# Altium PCB Panel 1.PcbDoc (part 1 of 2)
Units mil, origin at the board's own origin, x right, y up, seen from the top; angles counter-clockwise.
Board outline 5905.51 x 2165.35 mil, 4 copper layers (Top Layer, Mid-Top, Mid-Bottom, Bottom Layer), stack 30.635 mil thick; 124 components, 107 nets, 426 pads, 164 vias.
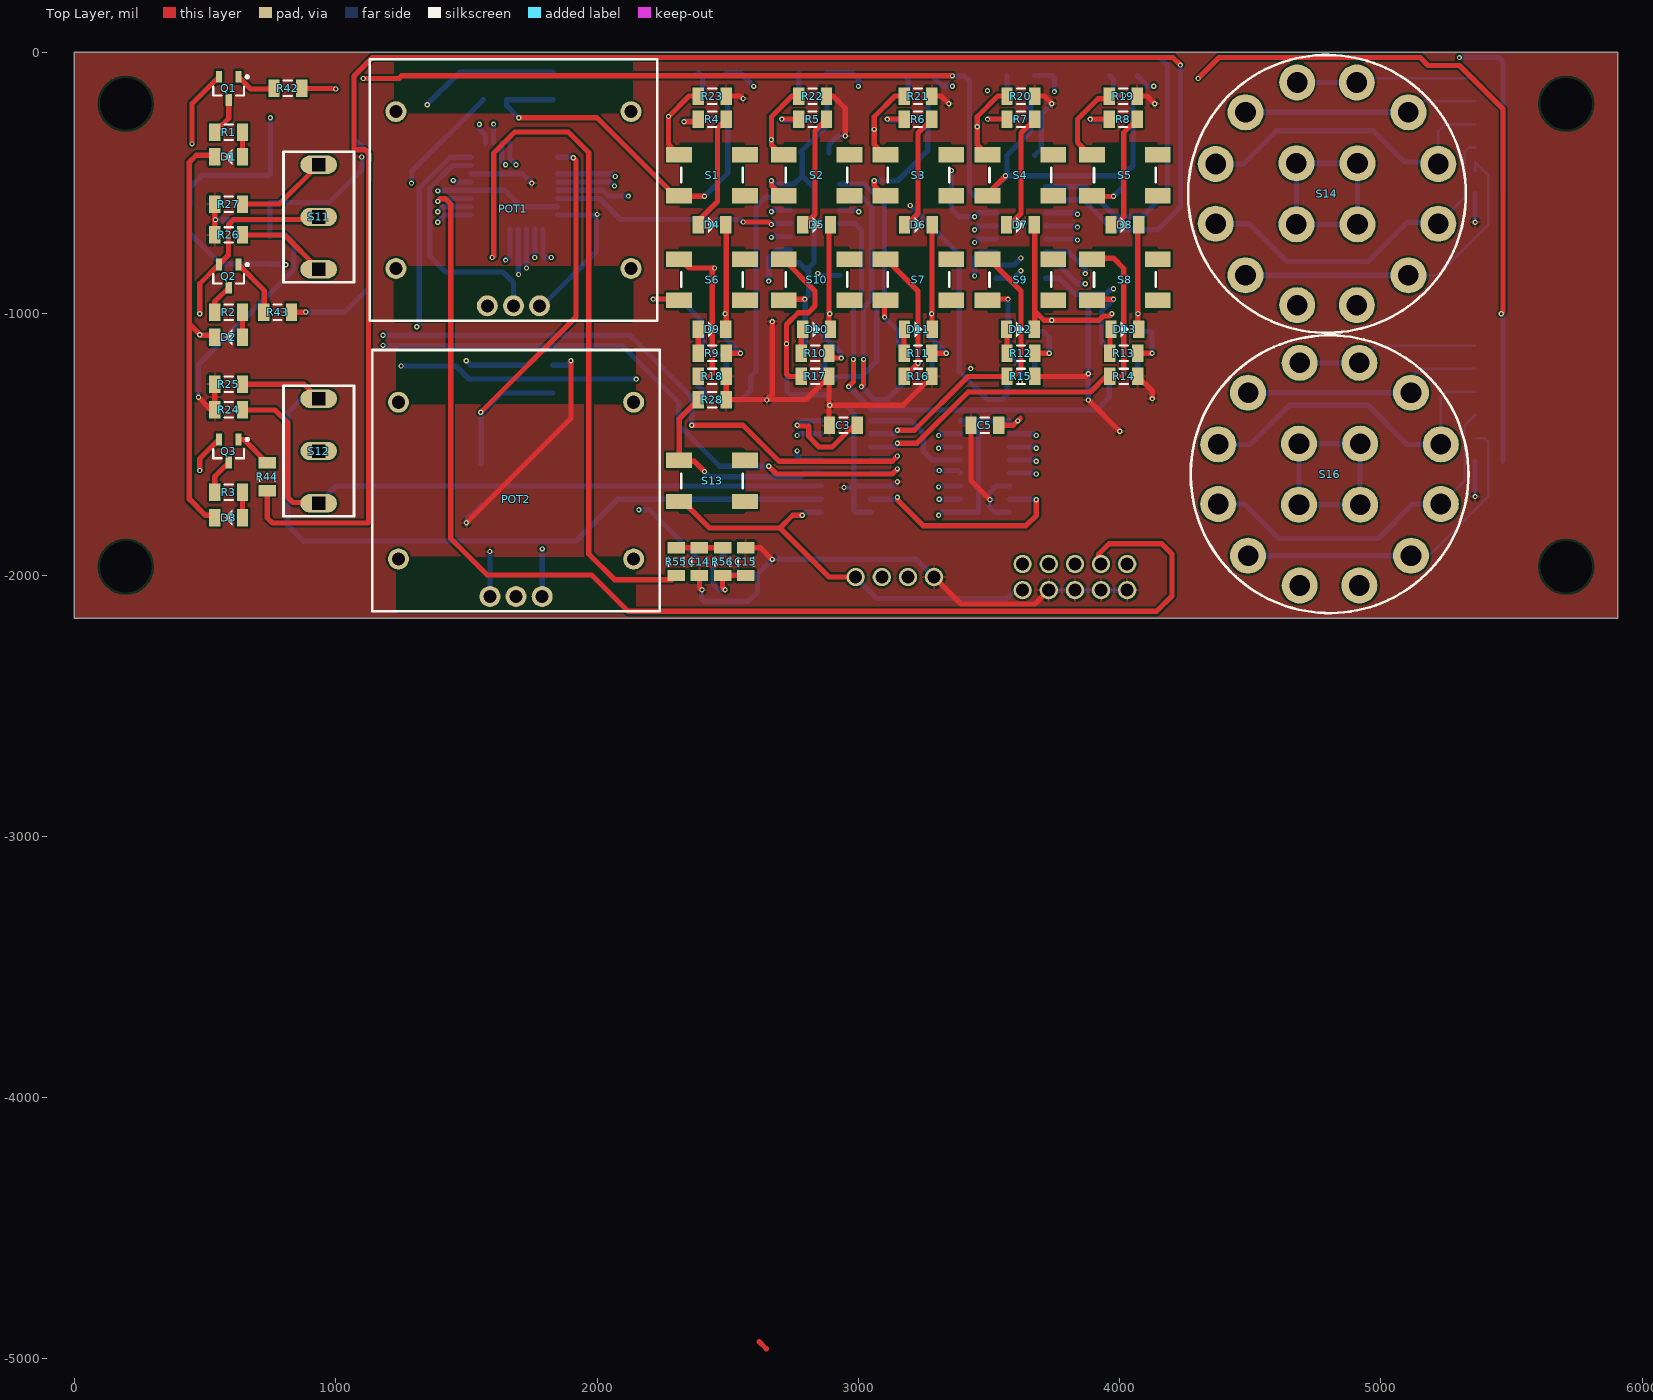
[diagram p0: Top Layer view]
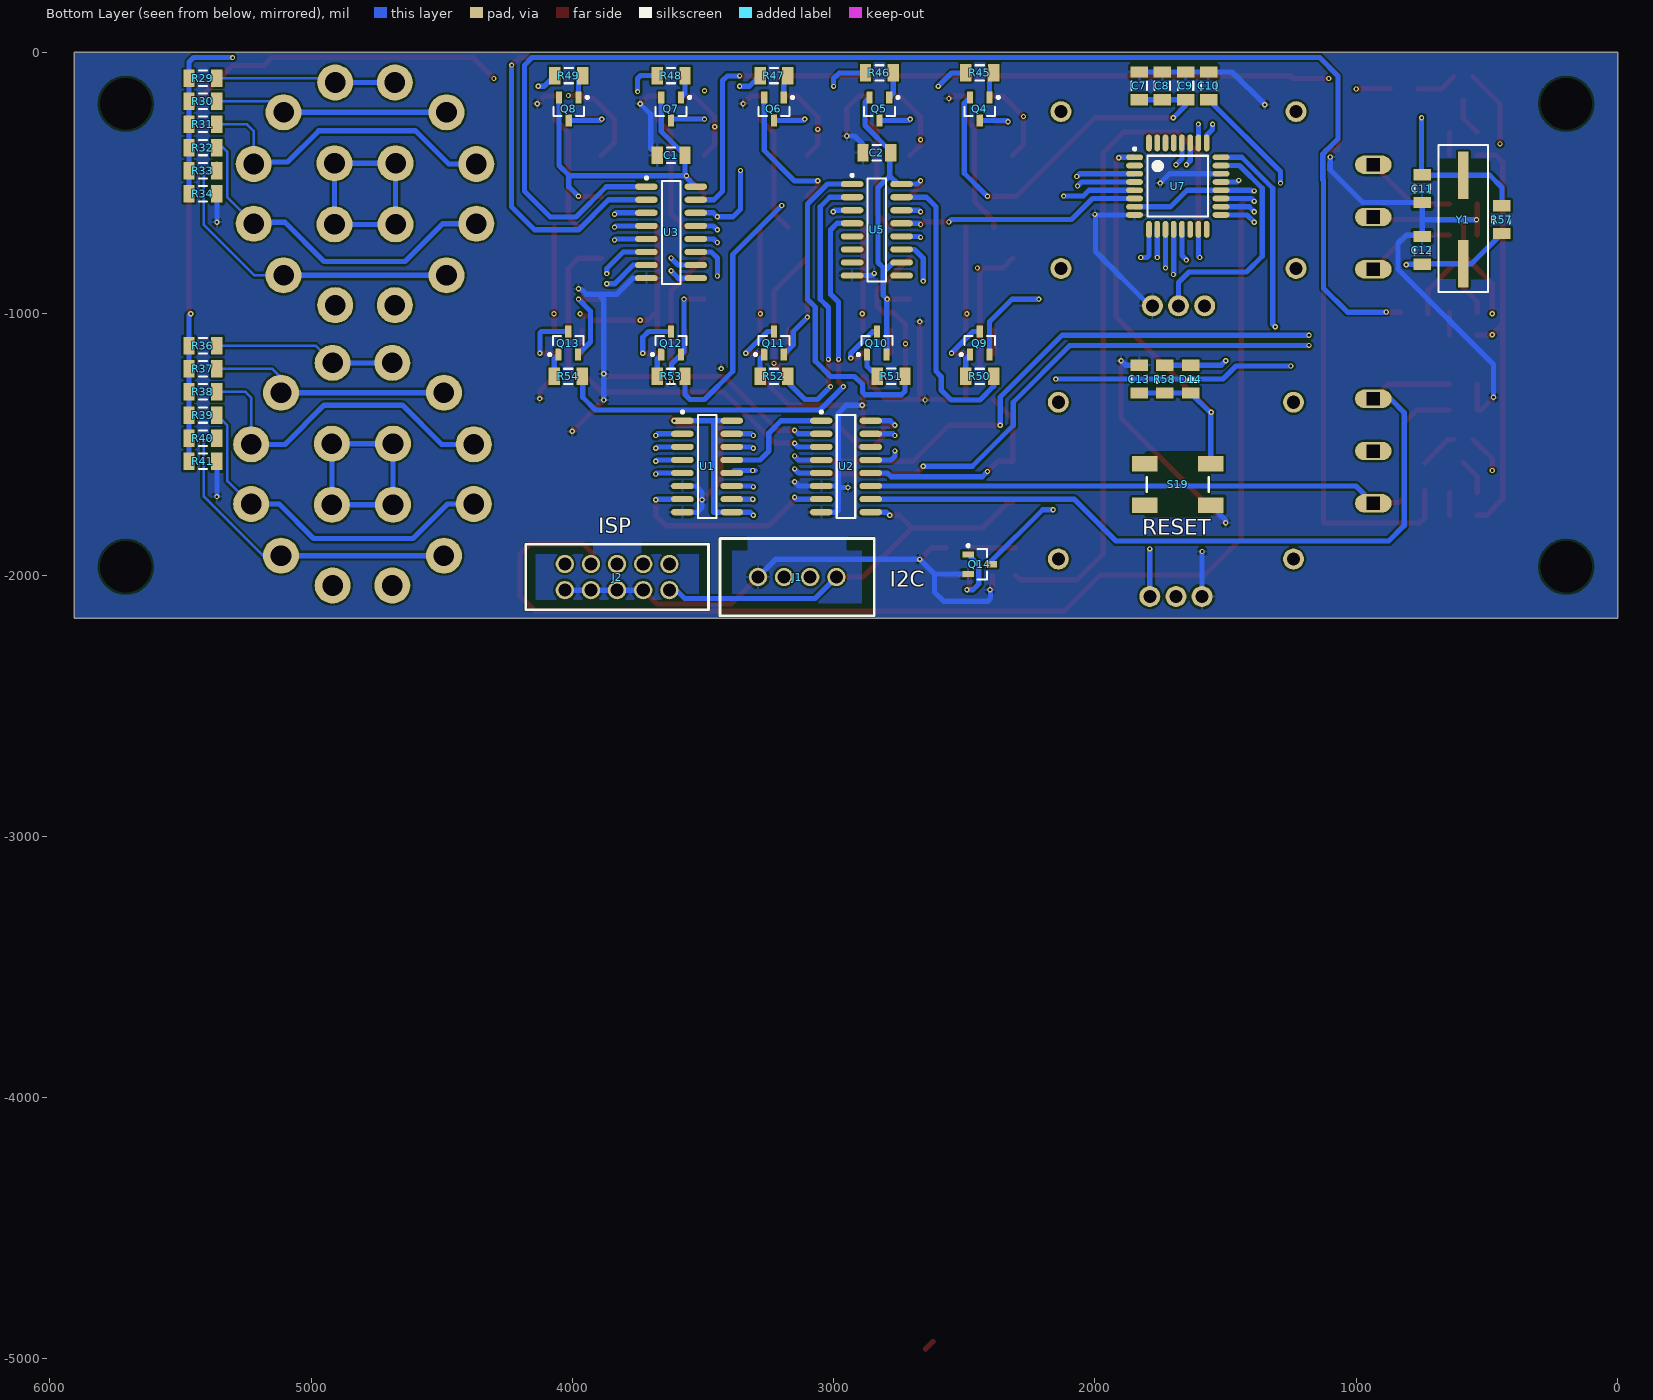
[diagram p1: Bottom Layer view, seen from below]
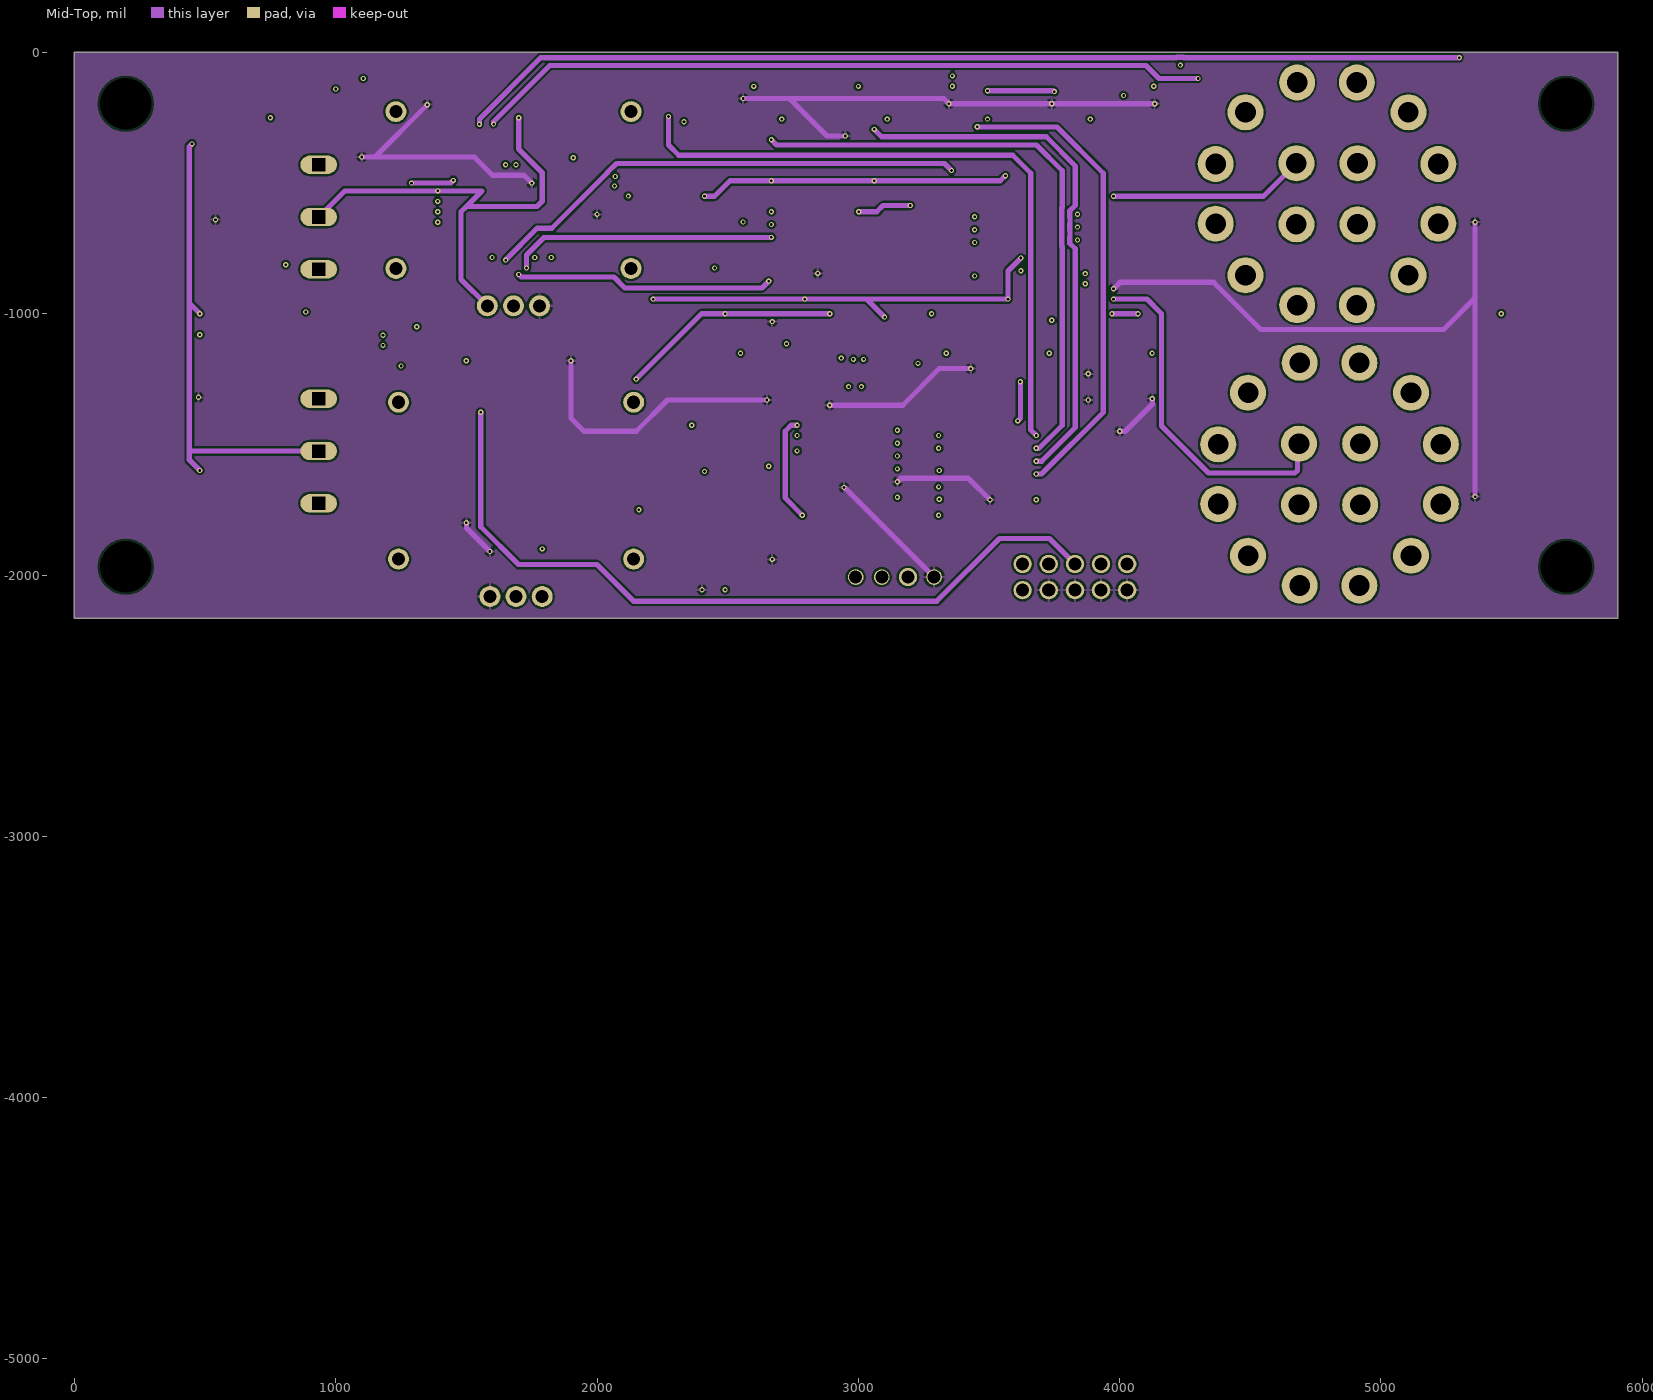
[diagram p2: Mid-Top]
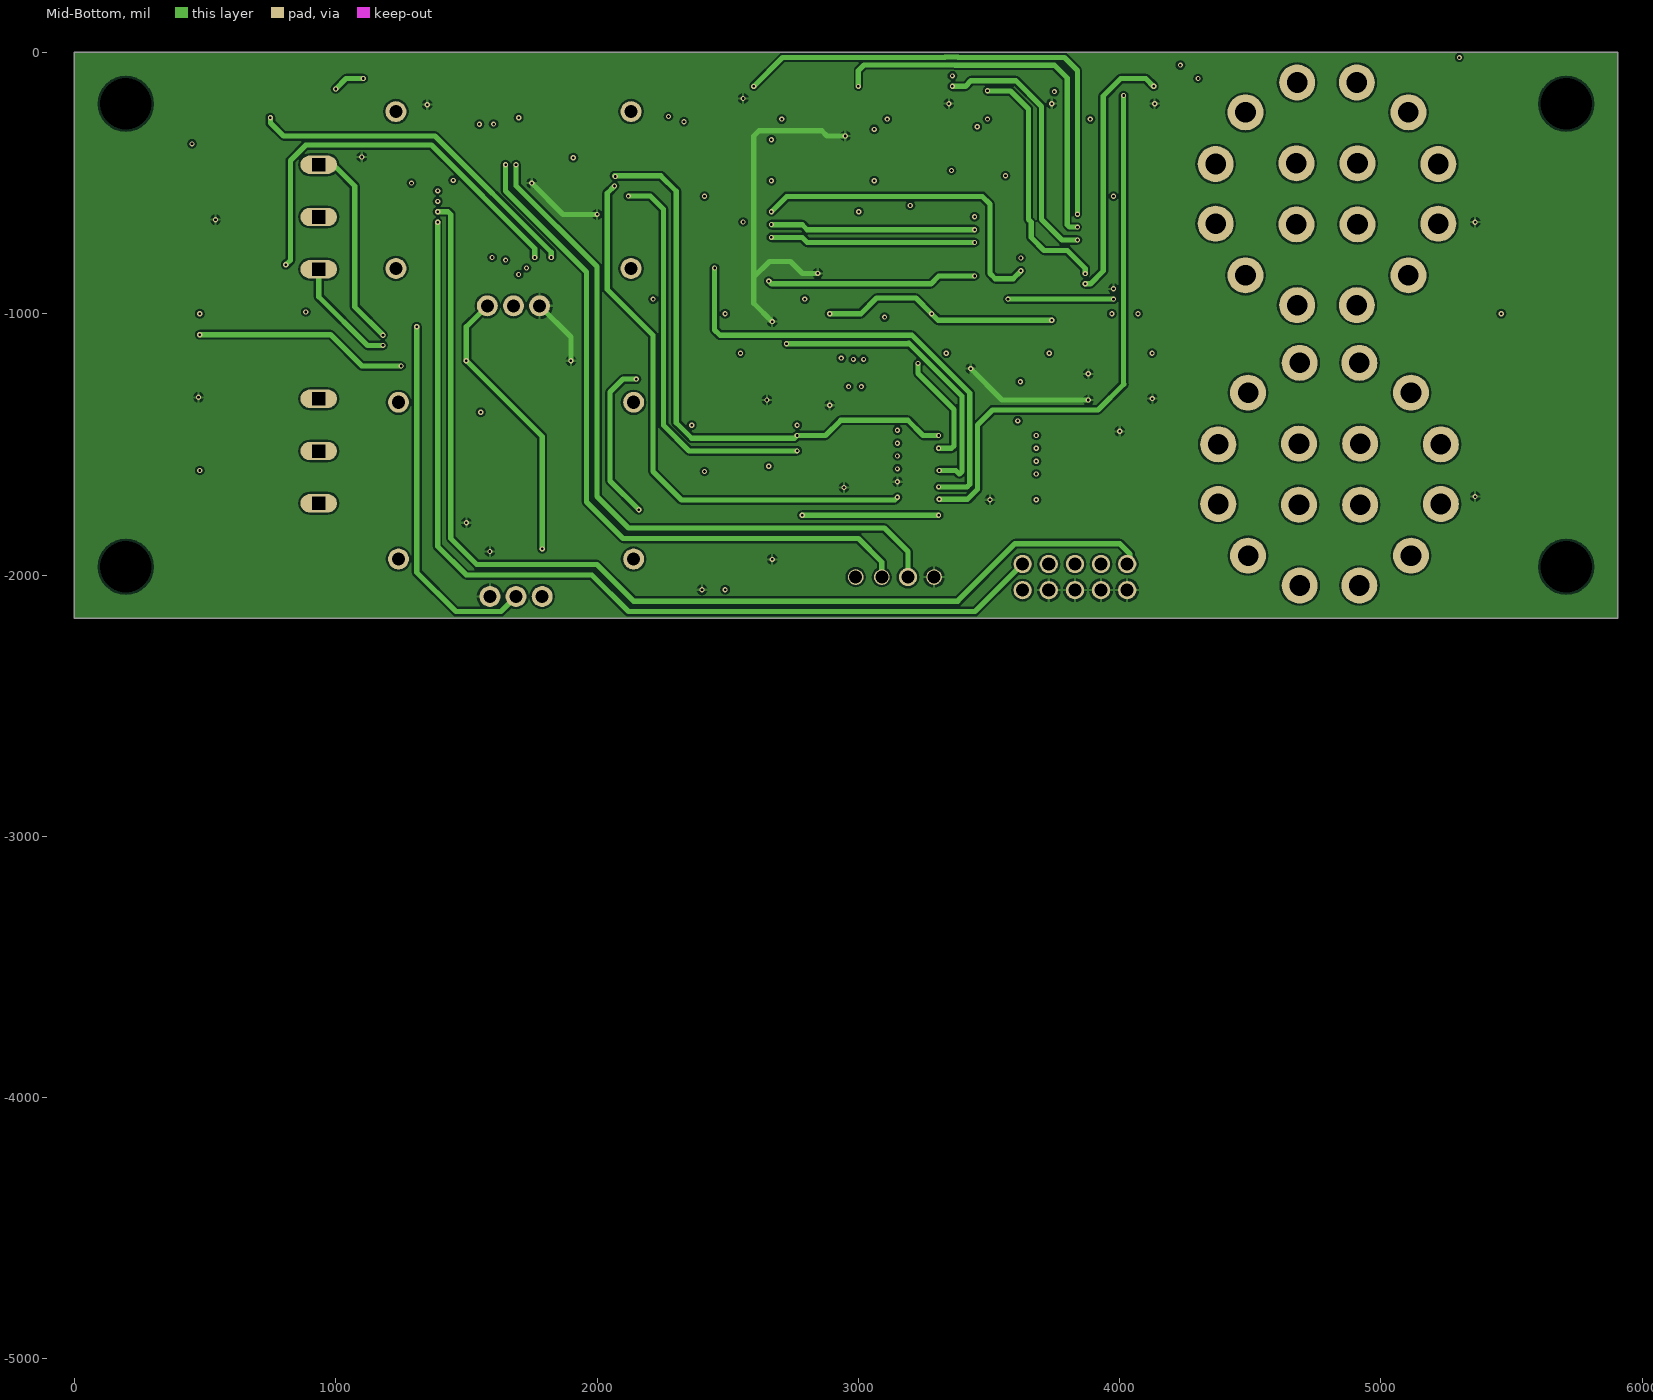
[diagram p3: Mid-Bottom]

## Layer stack, top to bottom
Top Solder: solder mask 0.4, Solder Resist, Dk 3.5
Top Layer: signal copper 1.4
Dielectric 1: core 10, FR-4, Dk 4.2
Mid-Top: signal copper 1.4173
Dielectric 3: prepreg 5, Dk 4.2
Mid-Bottom: signal copper 1.4173
Dielectric 2: core 10, Dk 4.2
Bottom Layer: signal copper 1.4
Bottom Solder: solder mask 0.4, Solder Resist, Dk 3.5

## Board outline
0,-2165.35 2952.76,-2165.35 5905.51,-2165.35 5905.51,-1771.65 5905.51,-1062.99 5905.51,-629.92 5905.51,-393.7 5905.51,0 0,0 0,-393.7 0,-787.4 0,-1102.36 0,-1377.95 0,-1771.65

## Design rules (kind name [scope] priority, off if disabled: settings)
Clearance [All] p1: gap=8 ignorepadtopadclearanceinfootprint=FALSE except(0: Arc-Hole Track-Hole SMDPad-Hole THPad-Hole Via-Hole Fill-Hole Poly-Hole Region-Hole Text-Hole)
Height [All] p1: minheight=0 maxheight=3937.01 prefheight=500
HoleSize [All] p1: absolutevalues=TRUE maxlimit=3937.01 minlimit=1 maxpercent=80.000 minpercent=20.000
HoleToHoleClearance [All] p1: gap=8 allowstackedmicrovias=TRUE
MinimumSolderMaskSliver [All] p1: minsoldermaskwidth=8
PolygonConnect [All] p1: connectstyle=Relief reliefconductorwidth=10 reliefentries=4 polygonreliefangle="90 Angle" airgapwidth=10
RoomDefinition Panel [InComponentClass('Panel')] p1 off: confinementstyle=ConfineIn formatcopy=TRUE lockcomponents=FALSE outline 20511.81,3608.27 41063,3608.27 41063,6994.1 20511.81,6994.1
RoutingVias [All] p1: holewidth=10 width=20 viastyle="Through Hole" minholewidth=10 minwidth=20 maxholewidth=10 maxwidth=20
SilkToSilkClearance [All] p1: silktosilkclearance=8
SilkToSolderMaskClearance [IsPad] p1: minsilkscreentomaskgap=8 clearancetoexposedcopper=TRUE
SolderMaskExpansion [All] p1: expansion=3
Width [All] p1: maxlimit=20 minlimit=10 preferedwidth=20
24 further rules are at their usual default settings.

## Classes and differential pairs
component class sterownik: C7 C8 C9 C10 C11 C12 C13 D14 J1 J2 R57 R58 S19 U7 Y1
component class SIPO: C3 C5 U3 U5
component class PISO: C1 C2 U1 U2
component class Driving: C14 C15 Q1 Q2 Q3 Q4 Q5 Q6 Q7 Q8 Q9 Q10 Q11 Q12 Q13 Q14 R42 R43 R44 R45 R46 R47 R48 R49 R50 R51 R52 R53 R54 R55 R56
component class Panel: D1 D2 D3 D4 D5 D6 D7 D8 D9 D10 D11 D12 D13 POT2 R1 R2 R3 R4 R5 R6 R7 R8 R9 R10 R11 R12 R13 R14 R15 R16 R17 R18 R19 R20 R21 R22 R23 R24 R25 R26 R27 R28 R29 R30 R31 R32 R33 R34 R36 R37 R38 R39 R40 R41 S1 S2 S3 S4 S5 S6 S7 S8 S9 S10 S11 S12 S13 S14

## Components (designator, comment, footprint, x,y, rotation, side; value= is the part's Value field where it differs from the comment)
C1 "Cap" C1206 3622.05,-393.7 r180 bottom
C2 "Cap" C1206 2834.65,-383.86 r180 bottom
C3 "Cap" C1206 2942.91,-1427.17 r0 top
C5 "Cap" C1206 3484.25,-1427.17 r0 top
C7 "Cap" C1206 1830.71,-127.95 r270 bottom
C8 "Cap" C1206 1742.13,-127.95 r270 bottom
C9 "Cap" C1206 1653.54,-127.95 r270 bottom
C10 "Cap" C1206 1564.96,-127.95 r90 bottom
C11 "Cap" C1206 748.03,-521.65 r90 bottom
C12 "Cap" C1206 748.03,-757.87 r270 bottom
C13 "Cap" C1206 1830.71,-1250 r270 bottom
C14 "Cap" C1206 2391.73,-1948.82 r90 top
C15 "Cap" C1206 2568.9,-1948.82 r270 top
D1 "Niebieska" "Dioda SMD 1206 Niebieska" 590,-400 r180 top
D2 "Zielona" "Dioda SMD 1206 Zielona" 590,-1090 r180 top
D3 "Biała" "Dioda SMD 1206 Biala" 590,-1780 r180 top
D4 "LED0" "Dioda SMD 1206 Zielona" 2440,-660 r0 top
D5 "LED0" "Dioda SMD 1206 Zielona" 2840,-660 r0 top
D6 "LED0" "Dioda SMD 1206 Zielona" 3230,-660 r0 top
D7 "LED0" "Dioda SMD 1206 Zielona" 3620,-660 r0 top
D8 "LED0" "Dioda SMD 1206 Zielona" 4020,-660 r0 top
D9 "LED0" "Dioda SMD 1206 Zielona" 2440,-1060 r0 top
D10 "LED0" "Dioda SMD 1206 Zielona" 2840,-1060 r0 top
D11 "LED0" "Dioda SMD 1206 Zielona" 3230,-1060 r0 top
D12 "LED0" "Dioda SMD 1206 Zielona" 3620,-1060 r0 top
D13 "LED0" "Dioda SMD 1206 Zielona" 4020,-1060 r0 top
D14 "1N4148" "DIODA 1N4148" 1633.86,-1250 r90 bottom
J1 "i2c" "IDC 4PIN" 3139.76,-2007.87 r0 bottom
J2 "SPI" "IDC 10PIN" 3828.74,-2007.87 r0 bottom
POT1 "RPot" "Potentiometer - duplicate" 1230.32,-826.77 r0 top
POT2 "POT2" Potentiometer 1240.16,-1938.98 r0 top
Q1 "PNP" SOT-23B_N 590.55,-137.8 r270 top
Q2 "PNP" SOT-23B_N 590.55,-856.3 r270 top
Q3 "PNP" SOT-23B_N 590.55,-1525.59 r270 top
Q4 "PNP" SOT-23B_N 2440.94,-216.54 r270 bottom
Q5 "PNP" SOT-23B_N 2824.8,-216.54 r270 bottom
Q6 "PNP" SOT-23B_N 3228.35,-216.54 r270 bottom
Q7 "PNP" SOT-23B_N 3622.05,-216.54 r270 bottom
Q8 "PNP" SOT-23B_N 4013.78,-216.54 r270 bottom
Q9 "PNP" SOT-23B_N 2440.94,-1112.2 r90 bottom
Q10 "PNP" SOT-23B_N 2834.65,-1112.2 r90 bottom
Q11 "PNP" SOT-23B_N 3228.35,-1112.2 r90 bottom
Q12 "PNP" SOT-23B_N 3622.05,-1112.2 r90 bottom
Q13 "PNP" SOT-23B_N 4015.75,-1112.2 r90 bottom
Q14 "NPN" SOT-23B_N 2440.94,-1958.66 r180 bottom
R1 "" C1206 590.55,-305.12 r0 top
R2 "Res2" C1206 590.55,-994.09 r0 top
R3 "Res2" C1206 590.55,-1683.07 r0 top
R4 "Res2" C1206 2440.94,-255.91 r0 top
R5 "Res2" C1206 2824.8,-255.91 r0 top
R6 "Res2" C1206 3228.35,-255.91 r0 top
R7 "Res2" C1206 3622.05,-255.91 r0 top
R8 "Res2" C1206 4013.78,-255.91 r0 top
R9 "Res2" C1206 2440.94,-1151.57 r180 top
R10 "Res2" C1206 2834.65,-1151.57 r180 top
R11 "Res2" C1206 3228.35,-1151.57 r180 top
R12 "Res2" C1206 3622.05,-1151.57 r180 top
R13 "Res2" C1206 4015.75,-1151.57 r180 top
R14 "Res2" C1206 4015.75,-1240.16 r180 top
R15 "Res2" C1206 3622.05,-1240.16 r180 top
R16 "Res2" C1206 3228.35,-1240.16 r180 top
R17 "Res2" C1206 2834.65,-1240.16 r180 top
R18 "Res2" C1206 2440.94,-1240.16 r180 top
R19 "Res2" C1206 4013.78,-167.32 r180 top
R20 "Res2" C1206 3622.05,-167.32 r180 top
R21 "Res2" C1206 3228.35,-167.32 r180 top
R22 "Res2" C1206 2824.8,-167.32 r180 top
R23 "Res2" C1206 2440.94,-167.32 r180 top
R24 "Res2" C1206 590.55,-1368.11 r0 top
R25 "Res2" C1206 590.55,-1269.68 r0 top
R26 "Res2" C1206 590.55,-698.82 r0 top
R27 "Res2" C1206 590.55,-580.71 r0 top
R28 "Res2" C1206 2440.94,-1328.74 r0 top
R29 "Res2" C1206 5413.39,-98.43 r0 bottom
R30 "Res2" C1206 5413.39,-187.01 r0 bottom
R31 "Res2" C1206 5413.39,-275.59 r0 bottom
R32 "Res2" C1206 5413.39,-364.17 r0 bottom
R33 "Res2" C1206 5413.39,-452.76 r0 bottom
R34 "Res2" C1206 5413.39,-541.34 r0 bottom
R36 "Res2" C1206 5413.39,-1122.05 r0 bottom
R37 "Res2" C1206 5413.39,-1210.63 r0 bottom
R38 "Res2" C1206 5413.39,-1299.21 r0 bottom
R39 "Res2" C1206 5413.39,-1387.8 r0 bottom
R40 "Res2" C1206 5413.39,-1476.38 r0 bottom
R41 "Res2" C1206 5413.39,-1564.96 r0 bottom
R42 "Res2" C1206 816.93,-137.8 r180 top
R43 "Res2" C1206 777.56,-994.09 r180 top
R44 "Res2" C1206 738.19,-1624.02 r90 top
R45 "Res2" C1206 2440.94,-78.74 r180 bottom
R46 "Res2" C1206 2824.8,-78.74 r180 bottom
R47 "Res2" C1206 3228.35,-88.58 r180 bottom
R48 "Res2" C1206 3622.05,-88.58 r180 bottom
R49 "Res2" C1206 4013.78,-88.58 r180 bottom
R50 "Res2" C1206 2440.94,-1240.16 r0 bottom
R51 "Res2" C1206 2780,-1240 r0 bottom
R52 "Res2" C1206 3228.35,-1240.16 r0 bottom
R53 "Res2" C1206 3622.05,-1240.16 r0 bottom
R54 "Res2" C1206 4015.75,-1240.16 r0 bottom
R55 "Res2" C1206 2303.15,-1948.82 r90 top
R56 "Res2" C1206 2480.32,-1948.82 r270 top
R57 "Res2" C1206 442.91,-639.76 r90 bottom
R58 "Res2" C1206 1732.28,-1250 r90 bottom
S1 "SW-PB" "Microswitch_SMT - duplicate" 2440,-470 r180 top
S2 "SW-PB" "Microswitch_SMT - duplicate" 2840,-470 r180 top
S3 "SW-PB" "Microswitch_SMT - duplicate" 3230,-470 r180 top
S4 "SW-PB" "Microswitch_SMT - duplicate" 3620,-470 r180 top
S5 "SW-PB" "Microswitch_SMT - duplicate" 4020,-470 r180 top
S6 "SW-PB" "Microswitch_SMT - duplicate" 2440,-870 r180 top
S7 "SW-PB" "Microswitch_SMT - duplicate" 3230,-870 r180 top
S8 "SW-PB" "Microswitch_SMT - duplicate" 4020,-870 r180 top
S9 "SW-PB" "Microswitch_SMT - duplicate" 3620,-870 r180 top
S10 "SW-PB" "Microswitch_SMT - duplicate" 2840,-870 r180 top
S11 "SW-SPDT" "3POZ SWITCH" 935.04,-629.92 r0 top
S12 "SW-SPDT" "3POZ SWITCH" 935.04,-1525.59 r0 top
S13 "SW-PB" "Microswitch_SMT - duplicate" 2440,-1640 r180 top
S14 "5SW" "ROT SW" 4793.31,-541.34 r0 top
S16 "5SW" "ROT SW" 4803.15,-1614.17 r0 top
S19 "SW-PB" "Microswitch_SMT - duplicate" 1683.07,-1653.54 r0 bottom
U1 "SN74HC166D" D016_N 3484.25,-1584.65 r180 bottom
U2 "SN74HC166D" D016_N 2952.76,-1584.65 r180 bottom
U3 "SN74HC595D" SOIC16_N 3622.05,-688.98 r180 bottom
U5 "SN74HC595N" SOIC16_N 2834.65,-679.13 r180 bottom
U7 "ATmega8A-AU" 32A_N 1683.07,-511.81 r180 bottom
Y1 "16Mhz" crystal 590.55,-639.76 r90 bottom

## Footprints (in the part's own frame and the unit in brackets; to place one, negate y for a bottom-side part, rotate by r counter-clockwise, add the part's x,y. Pads: shape width x height; smd on the part's side, far side on the other; paste and mask are expansions set on the pad)
"3POZ SWITCH" [mil] "SP3T switch"
  oval 140x70 hole 50 square: 1(0,-200) 2(0,0) 3(0,200)
  silkscreen extent -135,-250 135,250, body extent -135,-250 135,292, height 1107
32A_N [mm] "Thin QFP, 32-Leads, Body 7x7mm, Pitch 0.8mm, IPC Medium Density"
  oval 1.65x0.55 smd mask+0: 1(-4.2,2.8) 2(-4.2,2) 3(-4.2,1.2) 4(-4.2,0.4) 5(-4.2,-0.4) 6(-4.2,-1.2) 7(-4.2,-2) 8(-4.2,-2.8) 17(4.2,-2.8) 18(4.2,-2) 19(4.2,-1.2) 20(4.2,-0.4) 21(4.2,0.4) 22(4.2,1.2) 23(4.2,2) 24(4.2,2.8)
  oval 0.55x1.65 smd mask+0: 9(-2.8,-4.2) 10(-2,-4.2) 11(-1.2,-4.2) 12(-0.4,-4.2) 13(0.4,-4.2) 14(1.2,-4.2) 15(2,-4.2) 16(2.8,-4.2) 25(2.8,4.2) 26(2,4.2) 27(1.2,4.2) 28(0.4,4.2) 29(-0.4,4.2) 30(-1.2,4.2) 31(-2,4.2) 32(-2.8,4.2)
  silkscreen extent -4.33,-2.95 2.95,3.75, body extent -3.5,-3.5 3.5,3.5, height 1.2
C1206 [mm] "Chip Capacitor, Body 3.2x1.6mm, IPC High Density"
  rect 1.1x1.7 smd: 1(-1.35,0) 2(1.35,0)
  silkscreen extent -0.4,-0.75 0.4,0.75, body extent -1.7,-0.9 1.7,0.9, height 1.3
crystal [mm] "Rezonator , montaż smd"
  rect 4.6x1 smd: 1(-4.3,0) 2(4.3,0)
  silkscreen extent -7.05,-2.4 7.25,2.4, body extent -5.6,-2.4 5.7,2.4, height 4.2
D016_N [mm] "SOIC, 16-Leads, Body 9.9x3.9mm, Pitch 1.27mm, IPC Medium Density"
  oval 2.2x0.6 smd: 1(-2.4,4.445) 2(-2.4,3.175) 3(-2.4,1.905) 4(-2.4,0.635) 5(-2.4,-0.635) 6(-2.4,-1.905) 7(-2.4,-3.175) 8(-2.4,-4.445) 9(2.4,-4.445) 10(2.4,-3.175) 11(2.4,-1.905) 12(2.4,-0.635) 13(2.4,0.635) 14(2.4,1.905) 15(2.4,3.175) 16(2.4,4.445)
  silkscreen extent -2.53,-5 0.9,5.42, body extent -1.95,-4.95 1.95,4.95, height 1.75
"DIODA 1N4148" [mm] "Dioda uniwersalna, SMD"
  rect 1.1x1.7 smd: 1(-1.35,0) 2(1.35,0)
  silkscreen extent -0.38,-0.76 0.38,0.76, body extent -1.91,-0.89 1.91,2.29, height 1.25
"Dioda SMD 1206 Biala" [mm]
  rect 1.1x1.7 smd: 1(-1.35,0) 2(1.35,0)
  silkscreen extent -0.38,-0.76 0.38,0.76, body extent -1.91,-0.89 1.91,2.29, height 1.25
"Dioda SMD 1206 Niebieska" [mm]
  rect 1.1x1.7 smd: 1(-1.35,0) 2(1.35,0)
  silkscreen extent -0.38,-0.76 0.38,0.76, body extent -1.91,-0.89 1.91,2.29, height 1.25
"Dioda SMD 1206 Zielona" [mm]
  rect 1.1x1.7 smd: 1(-1.35,0) 2(1.35,0)
  silkscreen extent -0.38,-0.76 0.38,0.76, body extent -1.91,-0.89 1.91,2.29, height 1.25
"IDC 4PIN" [mil]
  round 70 / inner round 60 / far side round 70 hole 50: 1(-150,0) 2(-50,0) 4(150,0)
  round 70 hole 50: 3(50,0)
  silkscreen extent -295,-148 295,148, body extent -295,-148 295,148, height 472
"IDC 10PIN" [mil]
  round 70 hole 50: 1(-200,50) 2(-100,50) 3(0,50) 4(100,50) 5(200,50) 6(-200,-50) 7(-100,-50) 8(0,-50) 9(100,-50) 10(200,-50)
  silkscreen extent -350,-125 350,125, body extent -350,-125 350,125, height 350
"Microswitch_SMT - duplicate" [mm] "Tact switch, montaż przewlekany"
  rect 2.5x1.5 smd: 0(-3.2,-2) 0(3.2,-2) 1(-3.2,2) 1(3.2,2)
  silkscreen extent -3,-0.7 3,0.7, body extent -3,-3 3,3, height 7.05
Potentiometer [mil] "Potencjometr"
  round 80 hole 50: 0(0,0) 0(0,600) 0(900,0) 0(900,600) 1(350,-143) 2(450,-143) 3(550,-143)
  silkscreen extent -100,-200 1000,800, body extent -50,-200 950,800, height 1080
"Potentiometer - duplicate" [mil] "Potencjometr"
  round 80 hole 50: 0(0,0) 0(0,600) 0(900,0) 0(900,600) 1(350,-143) 2(450,-143) 3(550,-143)
  silkscreen extent -100,-200 1000,800, body extent -50,-200 950,800, height 1080
"ROT SW" [mm] "Przełącznik obrotowy"
  round 3.5 hole 2: 1(-2.899,10.818) 2(-7.92,7.92) 3(-10.818,2.899) 4(-10.818,-2.899) 5(-7.92,-7.92) 6(-2.899,-10.818) 7(2.899,-10.818) 8(7.92,-7.92) 9(10.818,-2.899) 10(10.818,2.899) 11(7.92,7.92) 12(2.899,10.818) A(-2.97,2.97) B(-2.97,-2.97) C(2.97,-2.97) D(2.97,2.97)
  silkscreen extent -13.5,-13.5 13.5,13.5, body extent -13.1,-13.1 13.1,13.1, height 35.5
SOIC16_N [mm] "SOIC, 16-Leads, Body 9.9x3.9mm, Pitch 1.27mm, IPC Medium Density"
  oval 2.2x0.6 smd: 1(-2.4,4.445) 2(-2.4,3.175) 3(-2.4,1.905) 4(-2.4,0.635) 5(-2.4,-0.635) 6(-2.4,-1.905) 7(-2.4,-3.175) 8(-2.4,-4.445) 9(2.4,-4.445) 10(2.4,-3.175) 11(2.4,-1.905) 12(2.4,-0.635) 13(2.4,0.635) 14(2.4,1.905) 15(2.4,3.175) 16(2.4,4.445)
  silkscreen extent -2.53,-5 0.9,5.42, body extent -2,-5 2,5, height 1.91
SOT-23B_N [mm] "SOT23, 3-Leads, Body 2.9x1.3mm, Pitch 0.95mm, Lead Span 2.4mm, IPC Medium Density"
  rect 1.15x0.6 smd: 1(-1.125,0.95) 2(-1.125,-0.95) 3(1.125,0)
  silkscreen extent -1.25,-1.5 0.7,1.93, body extent -0.7,-1.5 0.7,1.5, height 1.14

## Part data
C1 C2 C3 C5 C7 C8 C9 C10 C14 C15: "100nF"
C11 C12 C13: "22pF"
D1: library part LED0, "LED SMD Niebieska"
D2: library part LED0, "LED SMD Zielona"
D3: library part LED0, "LED SMD Biala"
D4 D5 D6 D7 D8 D9 D10 D11 D12 D13: "LED SMD Zielona"
D14: library part "Diode 1N4148", "Dioda 1N4148"
J1: library part I2C, "Gniazdo IDC 4PIN"
J2: "Gniazdo IDC 10PIN"
POT1: "Potencjometr 100K"
POT2: library part RPot, "Potencjometr 100K"
Q1 Q2 Q3 Q4 Q5 Q6 Q7 Q8 Q9 Q10 Q11 Q12 Q13: "PNP 100mA"
Q14: "NPN 500mA"
R1: library part Res2, "100R"
R2 R4 R5 R6 R7 R8 R9 R10 R11 R12 R13: "150R"
R3: "100R"
R14 R15 R16 R17 R18 R19 R20 R21 R22 R23 R24 R25 R26 R27 R28: "20K"
R29 R36 R55 R56: "1K"
R30 R37: "3K"
R31 R38: "7.5K"
R32 R39: "15K"
R33 R40: "43K"
R34 R41 R42 R43 R44 R45 R46 R47 R48 R49 R50 R51 R52 R53 R54 R58: "10K"
R57: "1M"
S1 S2 S3 S4 S5 S6 S7 S8 S9 S10 S13 S19: "Microswitch (SPST)"
S11 S12: "Przelacznik SP3T"
S14 S16: "Przelacznik obrotowy 5-pozycyjny"
U1 U2: "SN74HC166"
U3: library part SN74HC595N, "SN74HC595"
U5: "SN74HC595"
U7: library part ATmega8A-PU, "Atmega 8A-PU"
Y1: library part XTAL, "Kwarc 16MHz"

## Free pads (board coordinates)
  round 0 hole 196.85: ""(196.85,-1968.5) ""(196.85,-196.85) ""(5708.66,-1968.5) ""(5708.66,-196.85)

## Via types
v1: diameter 20, hole 10, Top Layer to Bottom Layer, 164 vias

## Nets (pads, with @x,y where several pads share a name; then routed paths per layer and width w, separated by ;. In a path a pad name is that pad's centre, name@x,y a point inside that pad or via, vN(x,y) a via of type N, cw(c..) or ccw(c..) an arc to the next point about the centre after c; other vN are vias at no path point)
+5: C1.2 C2.2 C3.2 C5.2 C7.2 C8.2 C9.2 D14.2 J1.1 J2.1 POT1.1 POT2.3 Q1.2 Q2.2 Q3.2 Q4.2 Q5.2 Q6.2 Q7.2 Q8.2 Q9.2 Q10.2 Q11.2 Q12.2 Q13.2 R58.2 S1.1@2314.02,-548.74 S2.1@2714.02,-548.74 S3.1@3104.02,-548.74 S4.1@3494.02,-548.74 S5.1@3894.02,-548.74 S6.1@2314.02,-948.74 S7.1@3104.02,-948.74 S8.1@3894.02,-948.74 S9.1@3494.02,-948.74 S10.1@2714.02,-948.74 S11.2 S12.2 S13.1@2314.02,-1718.74 S14.A S14.B S14.C S14.D S16.A S16.B S16.C S16.D U1.1 U1.9 U1.16 U2.9 U2.16 U3.10 U3.16 U5.10 U5.16 U7.7 U7.20 | length 24473.2
  Top Layer w20: v1@450,-350 450,-196.65 Q1.2@553.15,-93.5 ; v1@480,-1600 480,-1554.45 Q3.2@553.15,-1481.3 ; v1@480,-1000 480,-885.16 Q2.2@553.15,-812.01 590,-775.16 590,-660 610,-640 924.96,-640 S11.2@935.04,-629.92 ; v1(1700.16,-250.16) 1700.31,-250 2000,-250 2301.18,-551.18 2314.96,-551.18 2315.59,-550.55 v1(2411.42,-550.55) ; v1(2214.57,-944.25) 2314.33,-944.25 S6.1@2314.96,-944.88 ; S13.1@2314.96,-1722.44 2332.44,-1722.44 2430,-1820 2700,-1820 ; v1@2667.32,-492.13 2667.32,-509.84 S2.1@2708.66,-551.18 ; S10.1@2708.66,-944.88 2794.65,-944.88 v1(2795.28,-944.25) ; v1(2765.75,-1426.54) 2769.21,-1430 2810,-1430 2810,-1470 2850,-1510 2900,-1510 2982.83,-1427.17 C3.2@2996.06,-1427.17 ; v1(2785.43,-1771.02) 2748.98,-1771.02 2700,-1820 ; J1.1@2989.76,-2007.87 2887.87,-2007.87 2700,-1820 ; v1@3061.02,-492.13 3061.02,-509.84 S3.1@3102.36,-551.18 ; v1(3100.39,-1013.15) 3100.39,-946.85 S7.1@3102.36,-944.88 ; S9.1@3496.06,-944.88 3496.69,-944.25 v1(3572.83,-944.25) ; S4.1@3496.06,-551.18 3496.06,-539.37 v1@3562.99,-472.44 ; C5.2@3537.4,-1427.17 3592.83,-1427.17 3620,-1400 ; S8.1@3889.76,-944.88 3975.75,-944.88 v1(3976.38,-944.25) ; S5.1@3889.76,-551.18 3975.75,-551.18 v1(3976.38,-550.55)
  Mid-Top w20: v1(450.16,-350.16) 440,-360.31 440,-960 ; v1(480.16,-1600.16) 440,-1560 440,-1530 ; v1(480.16,-1000.16) 440,-960 ; S12.2@935.04,-1525.59 444.41,-1525.59 440,-1530 ; S11.2@935.04,-629.92 1034.8,-530.16 v1(1390.16,-530.16) 1390.31,-530 1560,-530 1500,-590 ; POT1.1@1580.32,-969.77 1480,-869.46 1480,-610 1500,-590 ; v1(1700.16,-250.16) 1700.16,-370.16 1790,-460 1790,-570 1770,-590 1500,-590 ; v1(2214.57,-944.25) v1(2795.28,-944.25) 3031.5,-944.25 ; v1(2411.42,-550.55) 2449.45,-550.55 2508.5,-491.5 v1(2667.32,-491.5) v1(3061.02,-491.5) 3543.31,-491.5 v1(3562.99,-471.81) ; v1(2765.75,-1426.54) 2743.46,-1426.54 2720,-1450 2720,-1705.59 v1(2785.43,-1771.02) ; v1(3100.39,-1013.15) 3031.5,-944.25 ; v1(3610.16,-1410.16) 3620.16,-1400.16 v1(3620.16,-1260.16) ; v1(3622.05,-786.77) 3572.83,-835.98 v1(3572.83,-944.25) 3031.5,-944.25 ; v1(3976.38,-944.25) 4104.25,-944.25 4160,-1000 4160,-1430 4340,-1610 4670,-1610 4680,-1600 4680,-1503.48 S16.A@4686.23,-1497.25 ; v1(3976.38,-550.55) 4550.25,-550.55 S14.A@4676.38,-424.42 ; 440,-1530 440,-960
  Mid-Bottom w20: POT1.1@1580.32,-969.77 1500,-1050.09 v1(1500,-1180) 1790.16,-1470.16 v1(1790.16,-1900.16) ; v1(2785.43,-1771.02) v1(3307.09,-1771.02) ; v1(3572.83,-944.25) v1(3976.38,-944.25)
  Bottom Layer w20: v1@1400,-530 1402.44,-527.56 1438.14,-527.56 1438.61,-528.03 1517.24,-528.03 U7.20@1517.72,-527.56 1647.56,-527.56 1710.55,-590.55 U7.7@1848.43,-590.55 ; v1(1500,-1180) 1516.85,-1196.85 D14.2@1633.86,-1196.85 R58.2@1732.28,-1196.85 ; v1@1700,-250 1653.54,-203.54 C9.2@1653.54,-181.1 C8.2@1742.13,-181.1 C7.2@1830.71,-181.1 ; v1@1790,-1900 v1(1790.16,-1900.16) POT2.3@1790.16,-2081.98 ; v1@2214.57,-944.88 2317.91,-944.88 2403.54,-1030.51 Q9.2@2403.54,-1156.5 ; v1@2411.42,-551.18 2500,-462.6 2500,-193.9 Q4.2@2478.35,-172.24 ; v1(2667.32,-491.5) 2679.96,-504.13 U5.16@2740.16,-504.13 2753.74,-504.13 2785.43,-472.44 ; U5.10@2740.16,-804.13 2772.64,-804.13 2801.34,-832.83 2810,-824.17 ; v1@2765.75,-1427.17 2783.27,-1409.65 U2.16@2858.27,-1409.65 ; v1@2785.43,-1771.65 2797.44,-1759.65 U2.9@2858.27,-1759.65 ; v1@2795.28,-944.88 v1@2795.59,-944.57 ; Q10.2@2797.24,-1156.5 2797.24,-946.22 v1@2795.59,-944.57 ; Q5.2@2862.2,-172.24 2880,-190.04 2880,-280 2781.5,-378.5 C2.2@2781.5,-383.86 2785.43,-387.8 2785.43,-472.44 ; J1.1@2989.76,-2007.87 3071.89,-2090 3570,-2090 3602.13,-2057.87 J2.1@3628.74,-2057.87 ; v1(3061.02,-491.5) 3061.65,-492.13 3149.61,-492.13 3265.75,-375.98 Q6.2@3265.75,-172.24 ; v1@3100.39,-1013.78 3154.53,-1067.91 3154.53,-1120.08 Q11.2@3190.95,-1156.5 ; v1@3307.09,-1771.65 3319.09,-1759.65 U1.9@3389.76,-1759.65 3459.65,-1759.65 3460,-1760 3460,-1409.65 ; U1.16@3389.76,-1409.65 3460,-1409.65 ; U3.10@3527.56,-813.98 3595.47,-813.98 v1@3622.05,-787.4 ; U3.16@3527.56,-513.98 3568.9,-472.64 v1@3568.9,-471.81 ; v1(3562.99,-471.81) v1@3568.9,-471.81 ; v1(3572.83,-944.25) 3572.83,-1144.68 Q12.2@3584.65,-1156.5 3620.16,-1192.01 v1(3620.16,-1260.16) ; U1.1@3578.74,-1409.65 3460,-1409.65 ; Q7.2@3659.45,-172.24 3659.45,-303.15 C1.2@3568.9,-393.7 v1@3568.9,-471.81 ; v1(3976.38,-944.25) 3930,-990.63 3930,-1108.15 Q13.2@3978.35,-1156.5 ; v1@3976.38,-551.18 4013.78,-513.78 4013.78,-470 ; Q8.2@4051.18,-172.24 4051.18,-432.6 4013.78,-470 ; S14.A@4676.38,-436.38 S14.B@4676.38,-658.26 S14.C@4910.23,-658.26 S14.D@4910.23,-424.42 S14.A@4676.38,-424.42 ; S16.A@4686.23,-1506.23 S16.B@4686.23,-1731.1 S16.C@4920.07,-1731.1 S16.D@4920.07,-1497.25 S16.A@4686.23,-1497.25 ; 2785.43,-472.44 2830,-517.01 2830,-804.17 2810,-824.17 ; v1@2795.59,-944.57 v1(2795.28,-944.25) 2810,-929.53 2810,-824.17 ; v1@3568.9,-471.81 4011.97,-471.81 4013.78,-470
AN0: POT1.2 U7.23 | length 905
  Bottom Layer w20: U7.23@1517.72,-433.07 1446.93,-433.07 1360,-520 1360,-780 1420,-840 1640,-840 1680.32,-880.32 POT1.2@1680.32,-969.77
AN1: POT2.2 U7.24 | length 2187.1
  Mid-Bottom w20: v1(1310.16,-1050.16) 1310.16,-1990.16 1460,-2140 1632.13,-2140 POT2.2@1690.16,-2081.98
  Bottom Layer w20: v1(1310.16,-1050.16) 1320,-1040.31 1320,-520 1438.43,-401.57 U7.24@1517.72,-401.57
AN2: R29.2 R30.2 R31.2 R32.2 R33.2 R34.2 U7.25 | length 4628.6
  Mid-Top w20: v1(1550,-275) 1550,-255 1784.29,-20.71 3866.76,-20.71 3867.23,-20.24 3892.08,-20.24 3892.55,-20.71 4217.73,-20.71 4219.86,-18.58 4244.71,-18.58 4246.84,-20.71 5299.29,-20.71 v1(5300,-20)
  Bottom Layer w20: v1(1550,-275) 1550,-295 1572.83,-317.83 U7.25@1572.83,-346.46 ; v1(5300,-20) 5450,-20 5466.54,-36.54 R29.2@5466.54,-98.43 R30.2@5466.54,-187.01 R31.2@5466.54,-275.59 R32.2@5466.54,-364.17 R33.2@5466.54,-452.76 R34.2@5466.54,-541.34
AN3: R36.2 R37.2 R38.2 R39.2 R40.2 R41.2 U7.26 | length 5521.5
  Top Layer w20: v1(4300,-100) 4380,-20 5150,-20 5180,-50 5300,-50 5466.54,-216.54 5466.54,-993.46 v1(5460.24,-999.76) v1@5460,-1000
  Mid-Top w20: v1(1604.33,-274.33) 1604.33,-265.67 1819.29,-50.71 3344.1,-50.71 3344.7,-50.11 3367.9,-50.11 3368.5,-50.71 4100.71,-50.71 4150,-100 v1(4300,-100)
  Bottom Layer w20: U7.26@1604.33,-346.46 v1(1604.33,-274.33) ; v1(5460.24,-999.76) 5466.54,-1006.06 R36.2@5466.54,-1122.05 R37.2@5466.54,-1210.63 R38.2@5466.54,-1299.21 R39.2@5466.54,-1387.8 R40.2@5466.54,-1476.38 R41.2@5466.54,-1564.96
AREF: C10.1 U7.21 | length 667.3
  Mid-Top w20: v1@1290.31,-500 v1(1290.16,-500.16) 1439.84,-500.16 v1(1450,-490)
  Bottom Layer w20: v1@1290,-500 1290,-456.06 C10.1@1564.96,-181.1 ; v1(1450,-490) 1456.06,-496.06 U7.21@1517.72,-496.06
GND: C1.1 C2.1 C3.1 C5.1 C7.1 C8.1 C9.1 C10.2 C11.1 C12.1 C13.1 C14.1 C15.1 J1.4 J2.2 J2.3 J2.4 J2.5 POT1.3 POT2.1 Q14.2 R14.1 R15.1 R16.1 R17.1 R18.1 R19.1 R20.1 R21.1 R22.1 R23.1 R24.1 R25.1 R26.1 R27.1 R28.2 R34.1 R41.1 S19.1@1557.09,-1732.28 U1.6 U1.8 U2.6 U2.8 U3.8 U5.8 U7.8 U7.22 | length 22428.5
  Top Layer w20: v1(475,-1320) 523.11,-1368.11 R24.1@537.4,-1368.11 R25.1@537.4,-1269.68 ; R26.1@537.4,-698.82 R27.1@537.4,-580.71 ; v1(1500.16,-1800.16) 1900.16,-1400.16 v1(1900.16,-1180.16) ; C14.1@2391.73,-2001.97 2391.73,-2047.24 v1@2401.57,-2057.09 ; R18.1@2494.09,-1240.16 R28.2@2494.09,-1328.74 v1@2650.16,-1328.74 ; R23.1@2494.09,-167.32 2549.21,-167.32 v1@2559.06,-177.17 ; C15.1@2568.9,-1895.67 2625.67,-1895.67 v1(2670.16,-1940.16) ; v1(2670.16,-1030.16) 2670.16,-1308.74 v1@2650.16,-1328.74 ; R22.1@2877.95,-167.32 2903.54,-167.32 2950,-213.78 v1(2950,-320) ; C3.1@2889.76,-1427.17 2887.8,-1425.2 R17.1@2887.8,-1240.16 2799.21,-1328.74 v1@2650.16,-1328.74 ; v1(2890.16,-1350.16) 3171.5,-1350.16 R16.1@3281.5,-1240.16 ; R21.1@3281.5,-167.32 3316.93,-167.32 v1@3346.46,-196.85 ; J1.4@3289.76,-2007.87 3392.76,-2110.87 3675.74,-2110.87 J2.2@3728.74,-2057.87 ; C5.1@3431.1,-1427.17 3431.1,-1639.13 v1(3503.94,-1711.97) ; R15.1@3675.2,-1240.16 3869.84,-1240.16 v1@3880,-1230 ; R20.1@3675.2,-167.32 3711.26,-167.32 v1(3740.16,-196.22) ; v1(3880.16,-1330.16) v1@4000,-1450 ; R19.1@4066.93,-167.32 4104.33,-167.32 v1@4133.86,-196.85 ; R14.1@4068.9,-1240.16 4125,-1296.26 v1(4125,-1325)
  Mid-Top w20: v1(1099.85,-400.28) 1150.03,-400.28 1150.16,-400.16 ; v1(1350.16,-200.16) 1150.16,-400.16 ; v1(1500.16,-1800.16) 1500.16,-1820.16 v1@1590,-1910 ; v1(1750.16,-500.16) 1720,-470 1600,-470 1530.16,-400.16 1150.16,-400.16 ; v1(1900.16,-1180.16) 1900,-1180.31 1900,-1400 1950,-1450 2150,-1450 2269.84,-1330.16 v1(2650.16,-1330.16) ; v1(2559.06,-176.54) 2736.22,-176.54 ; v1(2890.16,-1350.16) 3169.84,-1350.16 3309.84,-1210.16 v1(3430.16,-1210.16) ; v1(2945,-1665) 2946.89,-1665 J1.4@3289.76,-2007.87 ; v1(2950,-320) 2879.69,-320 2736.22,-176.54 ; v1(3149.61,-1643.07) 3162.68,-1630 3421.97,-1630 v1(3503.94,-1711.97) ; v1(3976.38,-904.88) 4001.26,-880 4360,-880 4540,-1060 5240,-1060 5360.24,-939.76 ; v1(4000.16,-1450.16) 4019.84,-1450.16 4125,-1345 v1(4125,-1325) ; v1(4133.86,-196.22) v1(3740.16,-196.22) v1(3346.46,-196.22) 3326.77,-176.54 2736.22,-176.54 ; v1(5360.24,-1699.76) 5360.24,-939.76 ; v1(5360.24,-649.76) 5360.24,-939.76
  Mid-Bottom w20: v1(1750.16,-500.16) 1870.16,-620.16 v1(2000.16,-620.16) ; POT1.3@1780.32,-969.77 1900.16,-1089.61 v1(1900.16,-1180.16) ; v1(2670.16,-1030.16) 2600,-960 2600,-860 ; v1(2844.49,-845.83) 2785.83,-845.83 2740,-800 2660,-800 2600,-860 ; v1(2950,-320) 2879.69,-320 2859.69,-300 2620,-300 2600,-320 2600,-860 ; v1(3430.16,-1210.16) 3550.16,-1330.16 v1(3880.16,-1330.16)
  Bottom Layer w20: v1(475,-1320) 475,-1195 840,-830 840,-730 810,-700 752.76,-700 C12.1@748.03,-704.72 748.03,-639.76 ; v1(540.16,-640.16) 747.64,-640.16 748.03,-639.76 ; v1@1100,-400 1100,-450 1099.82,-450 1072,-477.82 1072,-478 975.2,-574.8 C11.1@748.03,-574.8 748.03,-639.76 ; v1@1350,-200 1475.2,-74.8 C10.2@1564.96,-74.8 C9.1@1653.54,-74.8 C8.1@1742.13,-74.8 C7.1@1830.71,-74.8 ; v1@1500,-1800 1500,-1789.37 S19.1@1557.09,-1732.28 ; U7.22@1517.72,-464.57 1714.57,-464.57 v1@1750,-500 ; POT2.1@1590.16,-2081.98 v1(1590.16,-1910.16) ; POT1.3@1780.32,-969.77 1790.23,-969.77 1998.27,-761.73 v1@1998.27,-622.05 ; C13.1@1830.71,-1196.85 1883.15,-1196.85 v1@1900,-1180 ; U7.8@1848.43,-622.05 v1@1998.27,-622.05 ; v1(2000.16,-620.16) v1@1998.27,-622.05 ; v1@2002.05,-622.05 v1@1998.27,-622.05 ; v1(2401.57,-2056.46) 2400,-2058.03 2400,-2090 2410,-2100 2580,-2100 2613.94,-2066.06 2613.94,-1996.06 ; Q14.2@2485.24,-1996.06 2613.94,-1996.06 ; v1@2844.49,-846.46 2852.17,-854.13 U5.8@2929.13,-854.13 ; C2.1@2887.8,-383.86 2887.8,-352.2 2920,-320 v1(2950,-320) ; v1@2890,-1350 2950,-1350 2982.28,-1382.28 2982.28,-1663.39 ; v1(2945,-1665) 2980.67,-1665 2982.28,-1663.39 ; U2.8@3047.24,-1759.65 2989.96,-1759.65 2982.28,-1751.97 2982.28,-1663.39 ; v1@3149.61,-1643.7 3133.66,-1659.65 U2.6@3047.24,-1659.65 2986.02,-1659.65 2982.28,-1663.39 ; J1.4@3289.76,-2007.87 3221.89,-1940 2670,-1940 2613.94,-1996.06 ; U1.8@3578.74,-1759.65 3521.46,-1759.65 3503.94,-1742.13 3503.94,-1683.07 3527.36,-1659.65 U1.6@3578.74,-1659.65 ; C1.1@3675.2,-393.7 3700,-368.9 3700,-237.01 v1@3740.16,-196.85 ; U3.8@3716.54,-863.98 3767.52,-863.98 3828.74,-925.2 3900,-925.2 ; J2.2@3728.74,-2057.87 J2.3@3828.74,-2057.87 J2.4@3928.74,-2057.87 J2.5@4028.74,-2057.87 ; v1@3880,-1330 3880.16,-1329.84 v1(3880.16,-1230.16) 3880.16,-945.04 3900,-925.2 ; v1@3976.38,-905.51 3966.54,-905.51 3946.85,-925.2 3900,-925.2 ; v1@5360,-1700 5360,-1620 5360.24,-1620.24 R41.1@5360.24,-1564.96 ; v1(5360.24,-649.76) R34.1@5360.24,-541.34
IN0: R42.1 U3.15 | length 3123.8
  Top Layer w20: R42.1@870.08,-137.8 997.8,-137.8 v1(1000,-140) ; v1(1105,-100) 1241.64,-100 1252.16,-89.48 3359.48,-89.48 v1(3360,-90)
  Mid-Bottom w20: v1(1000,-140) 1040,-100 v1(1105,-100)
  Bottom Layer w20: v1(3360,-90) 3406.93,-90 3425.2,-108.27 3425.2,-531.5 3457.68,-563.98 U3.15@3527.56,-563.98
IN1: R43.1 U3.1 | length 5362.2
  Top Layer w20: R43.1@830.71,-994.09 885.2,-994.09 v1(885.83,-993.46)
  Bottom Layer w20: v1@885.83,-994.09 1033.46,-994.09 1125,-902.56 1125,-491.58 1128,-488.58 1128,-388.4 1111.6,-372 1111.42,-372 1070,-330.58 1070,-90 1140,-20 4153.86,-20 4183.07,-49.21 4183.07,-531.5 4084.65,-629.92 3986.22,-629.92 3870.28,-513.98 U3.1@3716.54,-513.98
IN2: R44.1 U3.2 | length 6605.1
  Top Layer w20: R44.1@738.19,-1677.17 738.19,-1781.5 757.87,-1801.18 1125,-1801.18 1125,-414.73 1128.03,-411.7 1128.03,-388.61 1111.7,-372.28 1070,-372.28 1070,-90 1140.32,-19.68 4203.39,-19.68 v1(4232.28,-48.58)
  Bottom Layer w20: U3.2@3716.54,-563.98 3861.22,-563.98 3976.38,-679.13 4143.7,-679.13 4232.28,-590.55 v1@4232.28,-49.21
IN3: R45.1 U3.3 | length 2108.5
  Mid-Bottom w20: v1@2600,-130 2710.32,-19.68 2713.48,-19.68 2713.95,-19.21 3330.34,-19.21 3331.45,-18.11 3381.15,-18.11 3382.25,-19.21 3762.43,-19.21 3762.9,-19.68 3789.37,-19.68 3838.58,-68.9 v1(3838.58,-619.45)
  Bottom Layer w20: R45.1@2494.09,-78.74 2548.74,-78.74 v1(2600.16,-130.16) ; U3.3@3716.54,-613.98 3832.48,-613.98 v1@3838.58,-620.08
IN4: R46.1 U3.4 | length 1778.7
  Mid-Bottom w20: v1@3000,-130 3000,-70 3021.89,-48.11 3368.73,-48.11 3369.83,-49.21 3750,-49.21 3799.21,-98.43 3799.21,-659.45 3808.43,-668.66 v1(3838.58,-668.66)
  Bottom Layer w20: R46.1@2877.95,-78.74 2978.74,-78.74 3000.16,-100.16 v1(3000.16,-130.16) ; U3.4@3716.54,-663.98 3833.27,-663.98 v1@3838.58,-669.29
IN5: R47.1 U3.5 | length 1213.4
  Mid-Bottom w20: v1(3360,-130) 3410,-130 3431.73,-108.27 3602.36,-108.27 3700.79,-206.69 3700.79,-639.76 3778.9,-717.87 v1(3838.58,-717.87)
  Bottom Layer w20: R47.1@3281.5,-88.58 3322.91,-130 v1(3360,-130) ; U3.5@3716.54,-713.98 3834.06,-713.98 v1@3838.58,-718.5
IN6: R48.1 U3.6 | length 1541.7
  Mid-Top w20: v1(3494.09,-147.01) 3747.01,-147.01 v1@3750,-150
  Mid-Bottom w20: v1@3494.09,-147.64 3582.68,-147.64 3651.57,-216.54 3651.57,-639.76 3661.42,-649.61 3661.42,-708.66 3710.63,-757.87 3799.21,-757.87 3868.11,-826.77 v1(3868.11,-846.46)
  Bottom Layer w20: R48.1@3675.2,-88.58 3738.58,-88.58 3750.16,-100.16 v1(3750.16,-150.16) ; U3.6@3716.54,-763.98 3805.32,-763.98 3868.11,-826.77 v1(3868.11,-846.46)